# Altium PCB PCB2.PcbDoc
Units mil, origin at the board's own origin, x right, y up, seen from the top; angles counter-clockwise.
Board outline 6000 x 4000 mil, 2 copper layers (Top Layer, Bottom Layer); 13 components, 10 nets, 33 pads, 6 vias.
Unrouted connection lines stored in the file: 22.
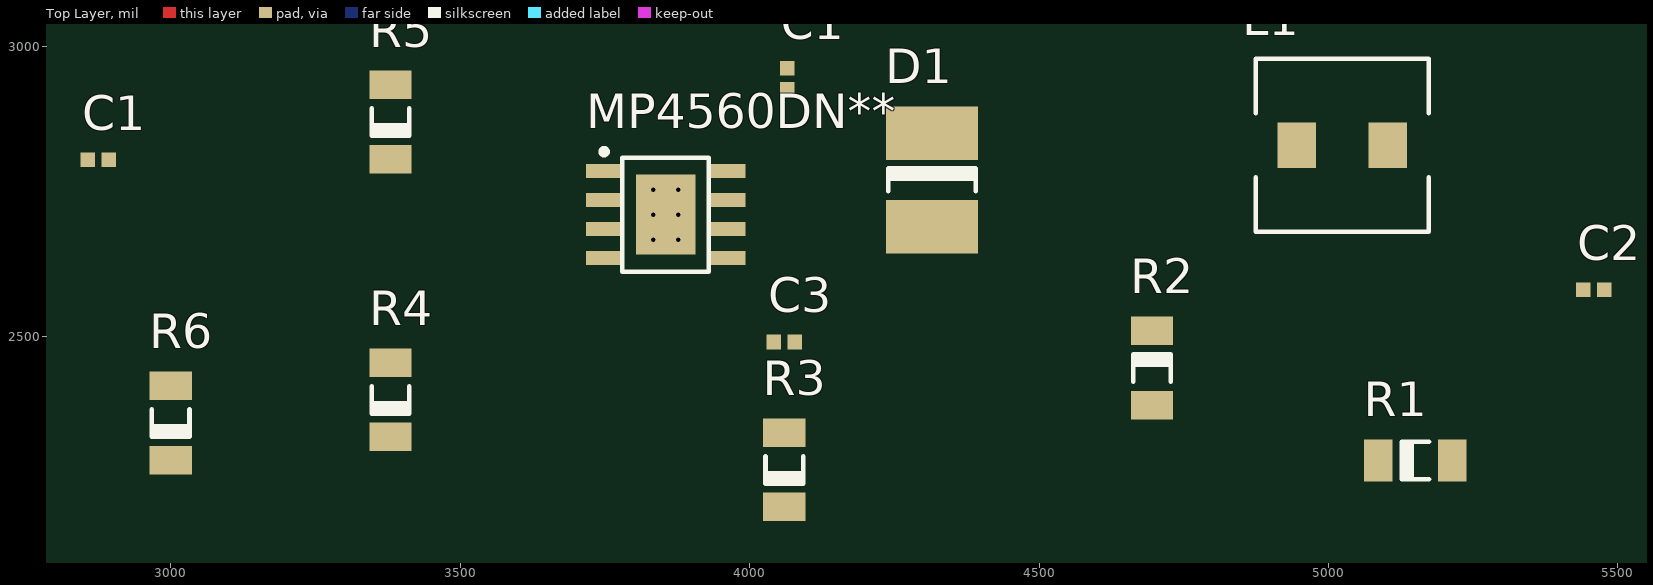
[diagram p0: Top Layer view]
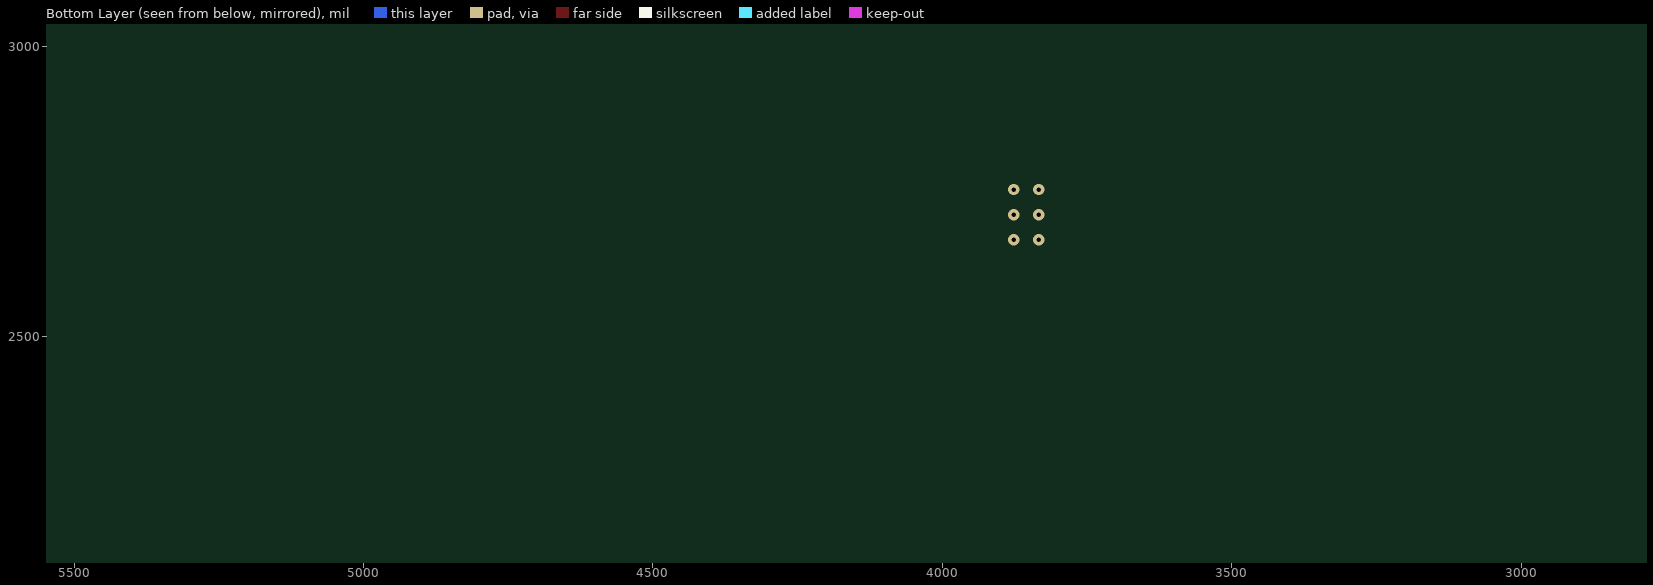
[diagram p1: Bottom Layer view, seen from below]

## Layer stack, top to bottom
Top Solder: solder mask 0.4, Solder Resist, Dk 3.5
Top Layer: signal copper 1.4
Dielectric 1: dielectric 12.6, FR-4, Dk 4.8
Bottom Layer: signal copper 1.4
Bottom Solder: solder mask 0.4, Solder Resist, Dk 3.5

## Board outline
1000,1000 7000,1000 7000,5000 1000,5000

## Design rules (kind name [scope] priority, off if disabled: settings)
Clearance [All] p1: gap=10 ignorepadtopadclearanceinfootprint=FALSE except(0: Arc-Hole Track-Hole SMDPad-Hole THPad-Hole Via-Hole Fill-Hole Poly-Hole Region-Hole Text-Hole)
PolygonConnect [All] p1: connectstyle=Relief reliefconductorwidth=10 reliefentries=4 polygonreliefangle="90 Angle" airgapwidth=10
RoutingVias [All] p1: holewidth=28 width=50 viastyle="Through Hole" minholewidth=28 minwidth=50 maxholewidth=28 maxwidth=50
SolderMaskExpansion [All] p1: expansion=4 istentingtop=FALSE
Width [All] p1: maxlimit=10 minlimit=10 preferedwidth=10
30 further rules are at their usual default settings.

## Classes and differential pairs
component class Sheet1: C1 C2 C3 D1 L1 MP4560DN** R1 R2 R3 R4 R5 R6

## Components (designator, comment, footprint, x,y, rotation, side; value= is the part's Value field where it differs from the comment)
C1 "100nF" CAPC1005X06N 4065,2945 r90 top
C1 "4.7uF 100V" CAPC1005X06N 2875,2805 r0 top
C2 "22uF 16V" CAPC1005X06N 5458.11,2580 r0 top
C3 "680pF" CAPC1005X06N 4060,2490 r0 top
D1 "Schottky" sss 4315,2770 r270 top
L1 "10uH" INDUCTOR 5023.74,2830 r0 top
MP4560DN** "Component_1" SOIC127P600X170_HS-9N 3855,2710 r0 top
R1 "124k" DIOMELF3516N 5150,2285 r0 top
R2 "40.2k" DIOMELF3516N 4695,2445 r270 top
R3 "42.3k" DIOMELF3516N 4060,2268.98 r90 top
R4 "200k" DIOMELF3516N 3380,2390 r90 top
R5 "100k" DIOMELF3516N 3380,2870 r90 top
R6 "24.9k" DIOMELF3516N 3000,2350 r90 top

## Footprints (in the part's own frame and the unit in brackets; to place one, negate y for a bottom-side part, rotate by r counter-clockwise, add the part's x,y. Pads: shape width x height; smd on the part's side, far side on the other; paste and mask are expansions set on the pad)
CAPC1005X06N [mm] "Chip Capacitor, 2-Leads, Body 1.00x0.50mm, IPC Medium Density"
  rect 0.64x0.64 smd: 1(-0.46,0) 2(0.46,0)
  body extent -0.55,-0.3 0.55,0.3, height 0.6
DIOMELF3516N [mm] "MELF Diode, 2-Leads, Body 3.50x1.65mm, IPC Medium Density"
  rect 1.25x1.85 smd: 1(-1.625,0) 2(1.625,0)
  silkscreen extent -0.6,-0.83 0.6,0.82, body extent -1.85,-0.85 1.85,0.85, height 1.7
INDUCTOR [mm] "Precision Wire Wound Inductor, 2-Leads, Body 7.30x7.30mm, IPC Medium Density"
  rect 1.7x2 smd: 1(-2,0) 2(2,0)
  silkscreen extent -3.8,-3.8 3.8,3.8, body extent -3.75,-3.65 3.75,3.65, height 3.6
SOIC127P600X170_HS-9N [mm] "SOIC, 8-Leads, Body 4.90x3.90mm, Pitch 1.27mm, Thermal Pad 3.51x2.62mm, IPC Medium Density"
  rect 1.6x0.61 smd: 1(-2.7,1.905) 2(-2.7,0.635) 3(-2.7,-0.635) 4(-2.7,-1.905) 5(2.7,-1.905) 6(2.7,-0.635) 7(2.7,0.635) 8(2.7,1.905)
  rect 2.62x3.51 smd: 9(0,0)
  silkscreen extent -2.82,-2.5 1.9,2.88, body extent -3,-2.5 3,2.5, height 1.7
sss [mm] "MELF Diode, 2-Leads, Body 5.30x3.62mm, IPC Medium Density"
  rect 2.35x4.05 smd: 1(-2.05,0) 2(2.05,0)
  silkscreen extent -0.5,-1.92 0.5,1.93, body extent -2.65,-1.81 2.65,1.81, height 3.62

## Part data
C1 C1 C2 C3 R1 R2 R3 R4 R5 R6: library part Component_1
L1: library part Inducor, "4.7 µH Shielded Drum Core, Wirewound Inductor 2.9 A 35mOhm Max Nonstandard", Manufactureer="Würth Elektronik", Manufacturer part no=7447789004
MP4560DN**: "MP4560 / 2A, 2MHz, 55V / Step-Down Converter", Manufacturer="Monolothic Power", Manufacturer part no=MP4560DN**

## Via types
v1: diameter 19.68, hole 7.87, Top Layer to Bottom Layer, 6 vias

## Nets (pads, with @x,y where several pads share a name; then routed paths per layer and width w, separated by ;. In a path a pad name is that pad's centre, name@x,y a point inside that pad or via, vN(x,y) a via of type N, cw(c..) or ccw(c..) an arc to the next point about the centre after c; other vN are vias at no path point)
EN: MP4560DN**.2 R5.1 R6.2
GND: C1.2@2893.11,2805 C2.2 D1.2 MP4560DN**.5 R2.1 R3.1 R4.1 R6.1
NetC1_1: C1.1@4065,2926.89 MP4560DN**.8
NetC1_2: C1.2@4065,2963.11 D1.1 L1.1 MP4560DN**.1
NetC3_1: C3.1 MP4560DN**.3
NetC3_2: C3.2 R3.2
NetMP4560DN**_4: MP4560DN**.4 R1.1 R2.2
NetMP4560DN**_6: MP4560DN**.6 R4.2
VIN: C1.1@2856.89,2805 MP4560DN**.7 R5.2
"VOUT 3.3V": C2.1 L1.2 R1.2
pads on no net: MP4560DN**.9
copper on no net:
  other v1: 3833.35,2666.69 3876.65,2666.69 3833.35,2710 3876.65,2710 3833.35,2753.31 3876.65,2753.31